# EAGLE board pumpkin-leds (EAGLE 5.12)
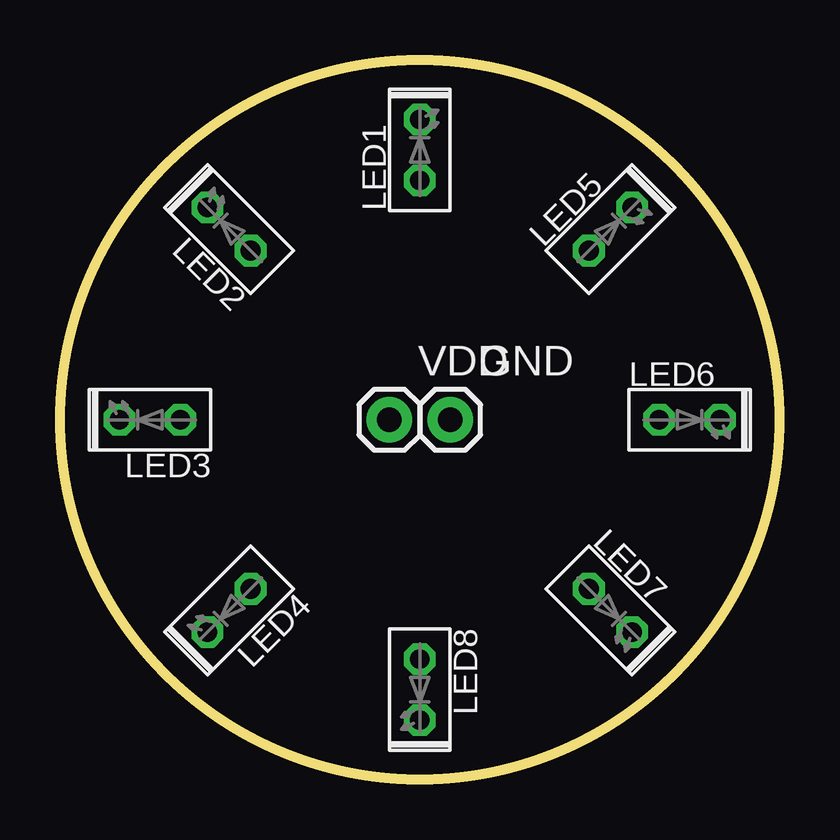
[diagram p0: board, top side]
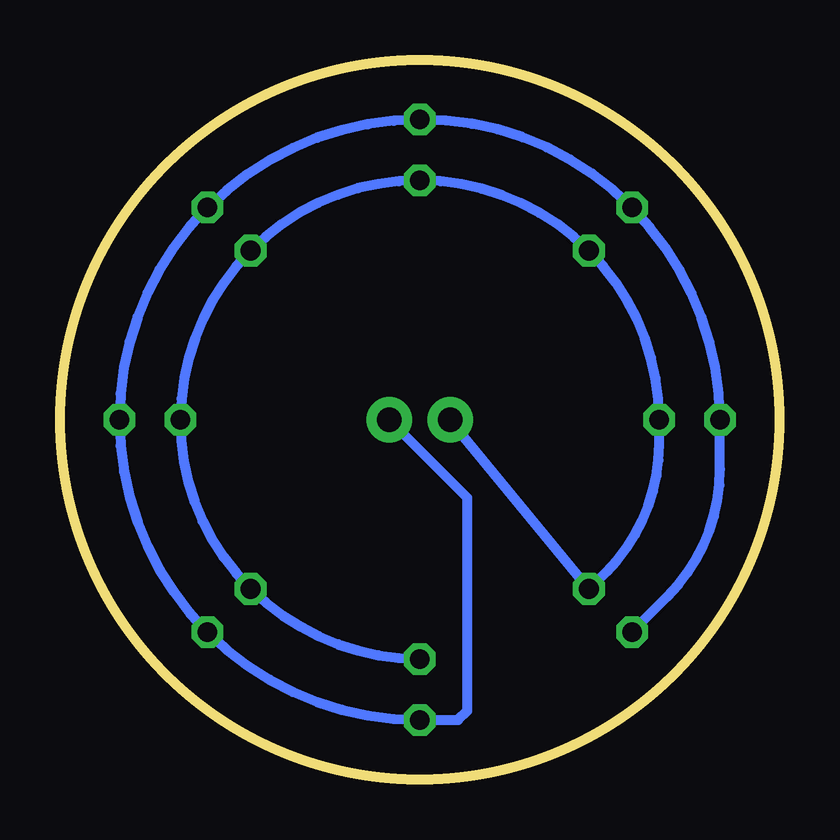
[diagram p1: board, bottom side, seen from below]

Size 30 x 30 mm. Coordinates in mm from the lower left corner, seen from the top.
Outline: circle at 15,15 radius 15
Copper layers (1*16): Top 0.035mm / dielectric 1.5mm / Bottom 0.035mm
Design rules "default": minimum track width 10mil, minimum drill 24mil, track to track 8mil, track to pad 8mil, pad to pad 8mil, via to via 8mil, smd to smd 8mil, copper to edge 40mil, drill to drill 8mil, minimum pad ring 10mil, minimum via ring 8mil, stop-mask expansion 4mil, vias tented up to drill 0mil, thermal gap 10mil

## Footprints (pad centres in the part's own frame; a part is rotated, then mirrored left to right if it is on the bottom)
1X01 = drill 1.016 pad 1.88 round: 1 0,0
LED2X5 = drill 0.813 octagon: A -1.27,0; K 1.27,0

## Placement (x,y rotation side)
GND  M01PTH  [1X01]  16.27,15 0 top
LED1  [LED2X5]  15,26.25 90 top
LED2  [LED2X5]  7.05,22.95 135 top
LED3  [LED2X5]  3.75,15 180 top
LED4  [LED2X5]  7.05,7.05 225 top
LED5  [LED2X5]  22.95,22.95 45 top
LED6  [LED2X5]  26.25,15 0 top
LED7  [LED2X5]  22.95,7.05 315 top
LED8  [LED2X5]  15,3.75 270 top
VDD  M01PTH  [1X01]  13.73,15 0 top

## Library data of the parts
GND VDD = SparkFun
LED1-LED8 = led

## Nets
GND: GND.1 LED1.K LED2.K LED3.K LED4.K LED5.K LED6.K LED7.K LED8.K
N$6: LED1.A LED2.A LED3.A LED4.A LED5.A LED6.A LED7.A LED8.A VDD.1

## Tracks (layer width: path | path; a pad name or v marks a point on that pad's centre or on a via)
GND
  Bottom 0.406: GND.1 13.02,11.75 13.02,2.86 13.4,2.48 LED8.K arc45 LED7.K arc45 LED6.K arc45 LED5.K arc44 LED1.K arc46 LED2.K arc44 LED3.K 2.48,12.93 arc45 4.68,7.63 LED4.K
N$6
  Bottom 0.406: VDD.1 LED4.A 7.22,8.66 arc-45 5.02,13.97 LED3.A arc-45 LED2.A arc-45 LED1.A arc-46 LED5.A arc-44 LED6.A arc-46 LED7.A arc-44 LED8.A